# Altium PCB Test_Board.PcbDoc
Units mm, origin at the board's own origin, x right, y up, seen from the top; angles counter-clockwise.
Board outline 93.04 x 21.21 mm, 2 copper layers (Top Layer, Bottom Layer); 50 components, 41 nets, 182 pads, 23 vias.
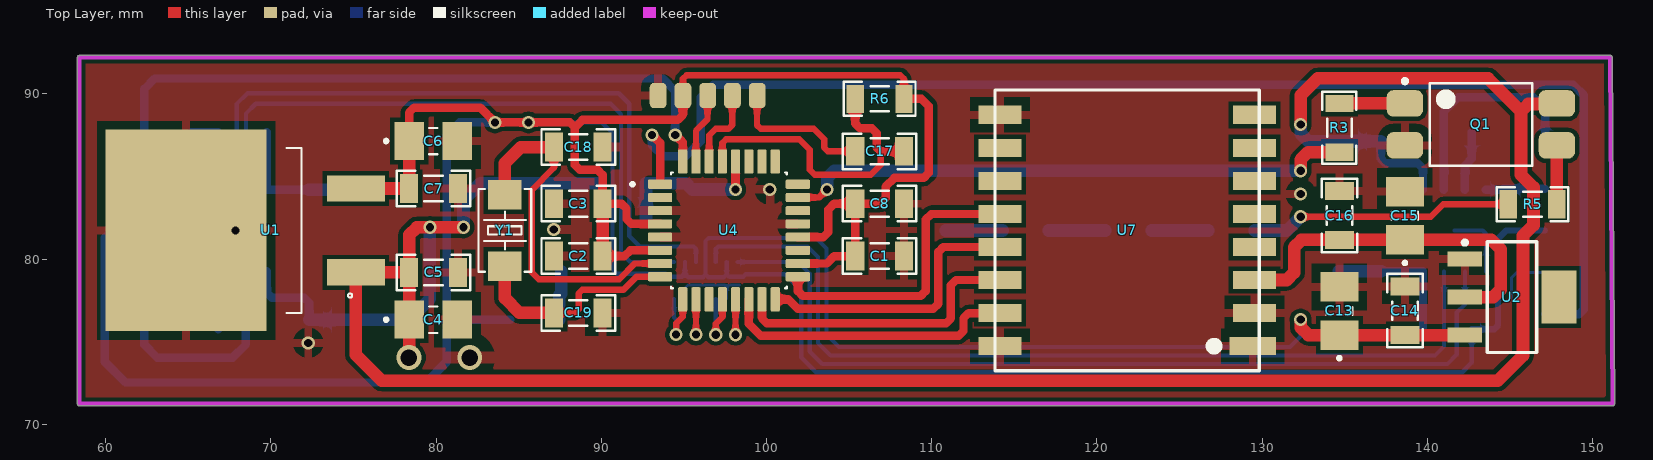
[diagram p0: Top Layer view]
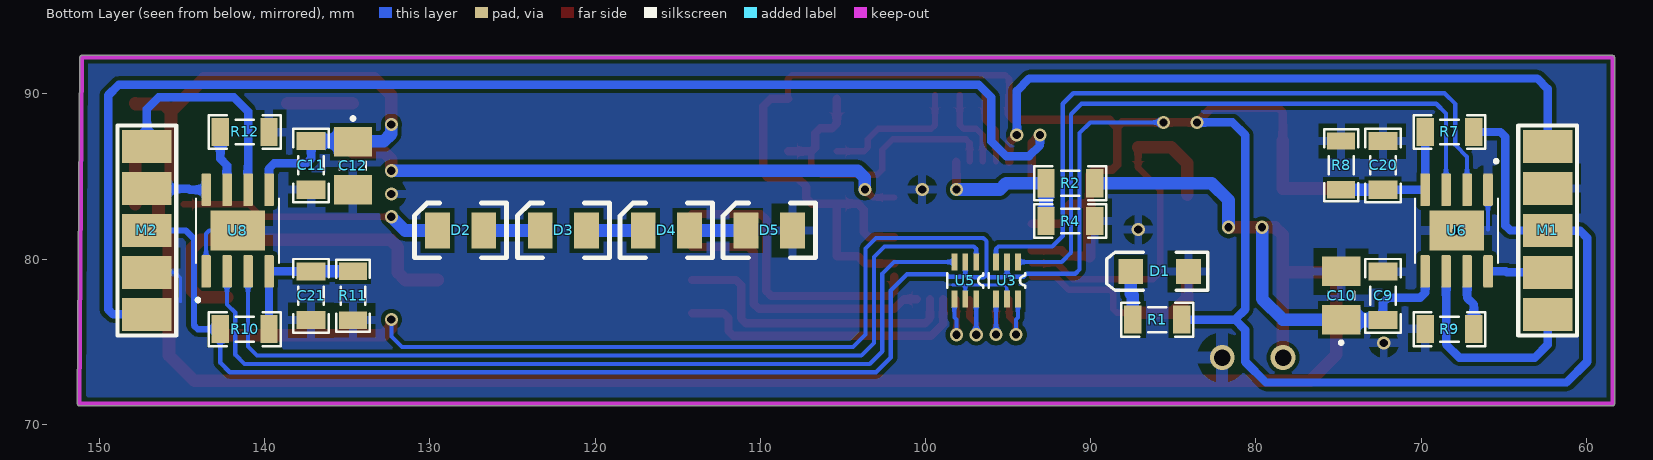
[diagram p1: Bottom Layer view, seen from below]
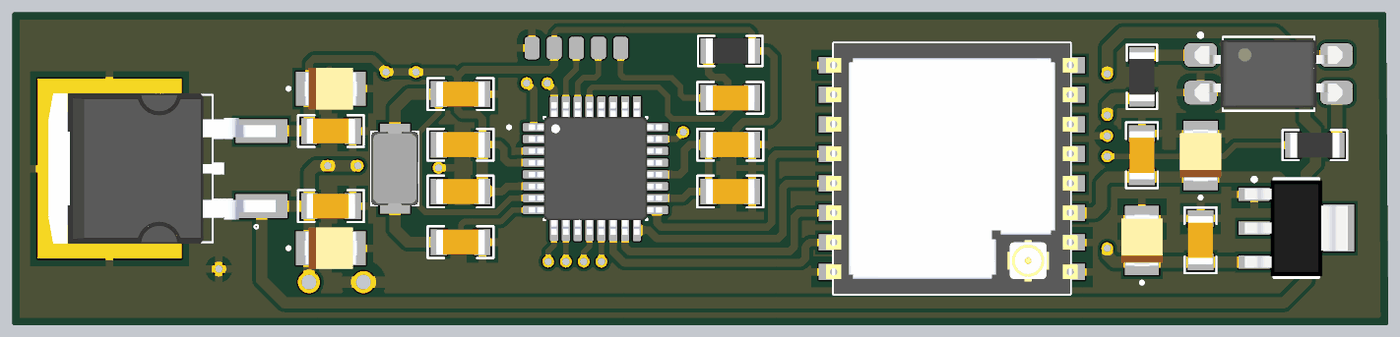
[diagram p2: 3D render of the assembled board from above, using the file's embedded part models]
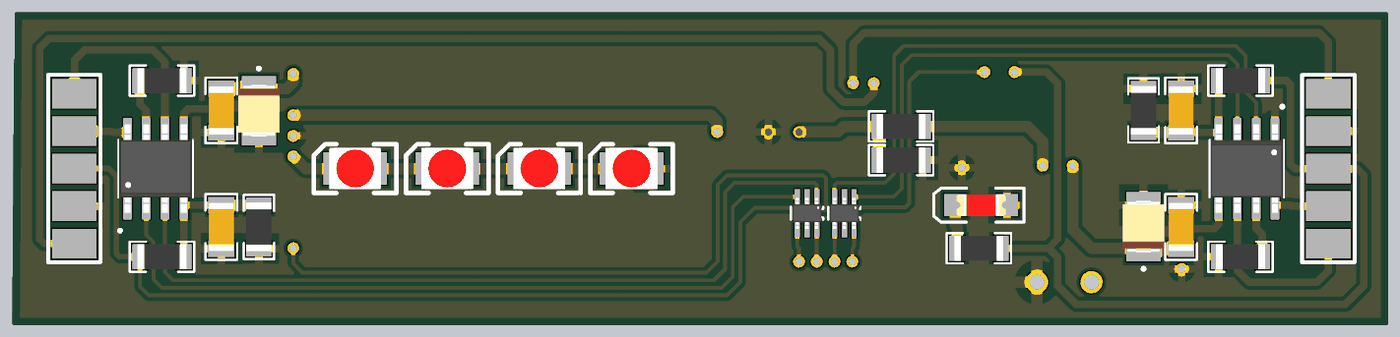
[diagram p3: 3D render of the assembled board from below, using the file's embedded part models]

## Layer stack, top to bottom
Top Solder: solder mask 0.0102, Solder Resist, Dk 3.5
Top Layer: signal copper 0.0356
Dielectric 1: dielectric 0.32, FR-4, Dk 4.8
Bottom Layer: signal copper 0.0356
Bottom Solder: solder mask 0.0102, Solder Resist, Dk 3.5

## Board outline
58.42,71.12 cw(c58.42,71.247) 58.293,71.247 58.293,92.202 cw(c58.42,92.202) 58.42,92.329 151.063,92.329 cw(c151.063,92.202) 151.191,92.203 151.335,71.248 151.335,71.247 cw(c151.208,71.247) 151.208,71.12

## Design rules (kind name [scope] priority, off if disabled: settings)
Clearance [All] p1: gap=0.254 ignorepadtopadclearanceinfootprint=FALSE except(0: Arc-Hole Track-Hole SMDPad-Hole THPad-Hole Via-Hole Fill-Hole Poly-Hole Region-Hole Text-Hole; 0.127: SMDPad-SMDPad)
ComponentClearance [All] p1: gap=0 collisioncheckmode=3 verticalgap=0.254 showdistances=FALSE
MinimumSolderMaskSliver [All] p1: minsoldermaskwidth=0
PolygonConnect [All] p1: connectstyle=Relief reliefconductorwidth=0.508 reliefentries=4 polygonreliefangle="90 Angle" airgapwidth=0.508
RoutingVias [All] p1: holewidth=0.8 width=0.8 viastyle="Through Hole" minholewidth=0.5 minwidth=0.5 maxholewidth=2 maxwidth=2
SilkToSilkClearance [All] p1: silktosilkclearance=0
SilkToSolderMaskClearance [IsPad] p1: minsilkscreentomaskgap=0 clearancetoexposedcopper=TRUE
SolderMaskExpansion [All] p1: expansion=0.102 istentingtop=FALSE
UnRoutedNet [All] p1: checkbadconnections=TRUE
Width [All] p1: maxlimit=1.27 minlimit=0.127 preferedwidth=0.508
25 further rules are at their usual default settings.

## Classes and differential pairs
component class Integrated_Test_Board: C3 C4 C5 C6 C7 C8 C9 C10 C11 C12 C14 C15 C16 C20 C21 D1 D2 D3 D4 D5 M1 M2 Q1 R1 R2 R3 R4 R5 R6 R7 R8 R9 R10 R11 R12 U1 U2 U3 U4 U5 U6 U7 U8 Y1

## Components (designator, comment, footprint, x,y, rotation, side; value= is the part's Value field where it differs from the comment)
C1 "Cap" "CAP 1206" 106.846,80.179 r0 top
C2 "Cap" "CAP 1206" 88.607,80.179 r180 top
C3 "Cap" "CAP 1206" 88.607,83.354 r180 top
C4 "Cap BiPolar" "CAP Tantalum Size B" 79.831,76.338 r0 top
C5 "Cap" "CAP 1206" 79.846,79.195 r0 top
C6 "Cap BiPolar" "CAP Tantalum Size B" 79.831,87.148 r0 top
C7 "Cap" "CAP 1206" 79.846,84.275 r0 top
C8 "Cap" "CAP 1206" 106.846,83.354 r0 top
C9 "Cap" "CAP 1206" 72.301,77.783 r90 bottom
C10 "Cap BiPolar" "CAP Tantalum Size B" 74.841,77.798 r90 bottom
C11 "Cap" "CAP 1206" 137.198,85.673 r270 bottom
C12 "Cap BiPolar" "CAP Tantalum Size B" 134.658,85.658 r270 bottom
C13 "Cap BiPolar" "CAP Tantalum Size B" 134.68,76.862 r90 top
C14 "Cap" "CAP 1206" 138.645,76.877 r90 top
C15 "Cap BiPolar" "CAP Tantalum Size B" 138.645,82.626 r90 top
C16 "Cap" "CAP 1206" 134.68,82.641 r90 top
C17 "Cap" "CAP 1206" 106.846,86.529 r180 top
C18 "Cap" "CAP 1206" 88.607,86.783 r180 top
C19 "Cap" "CAP 1206" 88.607,76.75 r180 top
C20 "Cap" "CAP 1206" 72.301,85.673 r90 bottom
C21 "Cap" "CAP 1206" 137.198,77.783 r270 bottom
D1 "LED" "LED 1206" 85.824,79.258 r0 bottom
D2 "LED" "LED 3528" 126.746,81.733 r0 bottom
D3 "LED" "LED 3528" 120.517,81.733 r0 bottom
D4 "LED" "LED 3528" 114.288,81.733 r0 bottom
D5 "LED" "LED 3528" 108.059,81.733 r0 bottom
M1 "Motor" Motor 62.344,76.655 r90 bottom
M2 "Motor" Motor 147.129,86.815 r270 bottom
Q1 "PC817" PC817 143.245,88.155 r0 top
R1 "Resistor" "RES 1206" 85.974,76.338 r180 bottom
R2 "Resistor" "RES 1206" 91.235,84.594 r180 bottom
R3 "Resistor" "RES 1206" 134.68,87.95 r270 top
R4 "Resistor" "RES 1206" 91.235,82.308 r0 bottom
R5 "Resistor" "RES 1206" 146.37,83.324 r0 top
R6 "Resistor" "RES 1206" 106.846,89.704 r0 top
R7 "Resistor" "RES 1206" 68.286,87.697 r180 bottom
R8 "Resistor" "RES 1206" 74.841,85.673 r270 bottom
R9 "Resistor" "RES 1206" 68.286,75.759 r180 bottom
R10 "Resistor" "RES 1206" 141.213,75.759 r0 bottom
R11 "Resistor" "RES 1206" 134.658,77.783 r90 bottom
R12 "Resistor" "RES 1206" 141.213,87.697 r0 bottom
U1 "LM7805" "7805 SMD" 68.445,81.735 r180 top
U2 "AMS1117" AMS1117 145.122,77.702 r0 top
U3 "GS4157B" GS4157B 95.07,78.706 r270 bottom
U4 "ATMEGA328P-AU" ATmega328 97.73,81.735 r0 top
U5 "GS4157B" GS4157B 97.593,78.706 r270 bottom
U6 "TB67H450FNG" TB67H450FNG 67.856,81.728 r270 bottom
U7 "RA-02" RA-02 121.834,81.735 r180 top
U8 "TB67H450FNG" TB67H450FNG 141.643,81.728 r90 bottom
Y1 "XTAL" Crystal-5032 84.162,81.735 r270 top

## Footprints (in the part's own frame and the unit in brackets; to place one, negate y for a bottom-side part, rotate by r counter-clockwise, add the part's x,y. Pads: shape width x height; smd on the part's side, far side on the other; paste and mask are expansions set on the pad)
"7805 SMD" [mm]
  rect 3.5x1.6 smd: 1(-6.7,2.54) 3(-6.7,-2.54)
  rect 9.75x12.2 smd paste-7: 4(3.575,0)
  silkscreen extent -6.48,-5 -2.51,5, body extent -7.71,-5.1 7.71,5.1, height 4.6
AMS1117 [mm]
  rect 2.1x0.9 smd: 1(-2.85,2.3) 2(-2.85,0) 3(-2.85,-2.3)
  rect 2.1x3.2 smd: 4(2.85,0)
  silkscreen extent -2.97,-3.35 1.5,3.42, body extent -3.49,-3.24 3.49,3.24, height 1.64
ATmega328 [mm]
  rrect25% 1.47x0.55 smd: 1(-4.17,2.8) 2(-4.17,2) 3(-4.17,1.2) 4(-4.17,0.4) 5(-4.17,-0.4) 6(-4.17,-1.2) 7(-4.17,-2) 8(-4.17,-2.8) 17(4.17,-2.8) 18(4.17,-2) 19(4.17,-1.2) 20(4.17,-0.4) 21(4.17,0.4) 22(4.17,1.2) 23(4.17,2) 24(4.17,2.8)
  rrect25% 0.55x1.47 smd: 9(-2.8,-4.17) 10(-2,-4.17) 11(-1.2,-4.17) 12(-0.4,-4.17) 13(0.4,-4.17) 14(1.2,-4.17) 15(2,-4.17) 16(2.8,-4.17) 25(2.8,4.17) 26(2,4.17) 27(1.2,4.17) 28(0.4,4.17) 29(-0.4,4.17) 30(-1.2,4.17) 31(-2,4.17) 32(-2.8,4.17)
  silkscreen extent -5.94,-3.5 3.5,3.5, body extent -4.5,-4.5 4.5,4.5, height 1.2
"CAP 1206" [mm]
  rect 1.1x1.75 smd: 1(-1.475,0) 2(1.475,0)
  silkscreen extent -2.23,-1.07 2.23,1.08, body extent -1.65,-0.85 1.65,0.85, height 0.94
"CAP Tantalum Size B" [mm]
  rect 1.79x2.31 smd: 1(-1.46,0) 2(1.46,0)
  silkscreen extent -2.95,-0.8 0.25,0.8, body extent -1.75,-1.4 1.75,1.4, height 2.1
Crystal-5032 [mil]
  rect 70x80 smd: 1(-85,0) 2(85,0)
  silkscreen extent -98,-63 98,63, body extent -98,-63 98,63, height 59
GS4157B [mil]
  rect 40x14 smd: 1(-44,26) 2(-44,0) 3(-44,-26) 4(44,-26) 5(44,0) 6(44,26)
  silkscreen extent -17,-43 17,43, body extent -41,-39 41,39, height 43
"LED 1206" [mm]
  rect 1.5x1.5 smd: 1(-1.75,0) 2(1.75,0)
  silkscreen extent -2.9,-1.15 3.2,1.15, body extent -1.65,-0.72 1.65,0.73, height 1.36
"LED 3528" [mm]
  rect 1.5x2.2 smd: 1(0,0) 2(2.8,0)
  silkscreen extent -1.39,-1.65 4.19,1.65, body extent -0.35,-1.41 3.15,1.39, height 1.8
Motor [mm]
  rect 2x3 smd: 1(0,0) 2(2.54,0) 3(5.08,0) 4(7.62,0) 5(10.16,0)
  silkscreen extent -1.27,-1.78 11.43,1.78
PC817 [mm]
  rrect50% 2.2x1.6 smd mask+0.06: 1(-4.6,1.27) 2(-4.6,-1.27) 3(4.6,-1.27) 4(4.6,1.27)
  silkscreen extent -4.72,-2.5 3.1,2.74, body extent -5,-2.29 5,2.29, height 3.89
RA-02 [mm]
  rect 2.8x1.1 smd: 1(-7.6,7)
  rect 2.6x1.1 smd: 2(-7.7,5) 3(-7.7,3) 4(-7.7,1) 5(-7.7,-1) 6(-7.7,-3) 7(-7.7,-5) 8(-7.7,-7) 9(7.7,-7) 10(7.7,-5) 11(7.7,-3) 12(7.7,-1) 13(7.7,1) 14(7.7,3) 15(7.7,5) 16(7.7,7)
  silkscreen extent -8,-8.5 8,8.5, body extent -8.5,-8.51 8.5,8.49, height 3.3
"RES 1206" [mm]
  rect 1.05x1.7 smd: 1(-1.475,0) 2(1.475,0)
  silkscreen extent -2.17,-1.02 2.17,1.02, body extent -1.65,-0.85 1.65,0.85, height 0.94
TB67H450FNG [mm]
  rrect25% 1.97x0.58 smd: 1(-2.47,1.905) 2(-2.47,0.635) 3(-2.47,-0.635) 4(-2.47,-1.905) 5(2.47,-1.905) 6(2.47,-0.635) 7(2.47,0.635) 8(2.47,1.905)
  rect 2.413x3.302 smd paste-3: 9(0,0)
  silkscreen extent -4.3,-2.51 1.95,2.51, body extent -3,-2.45 3,2.45, height 1.75

## Part data
C1: "AVCC Cap", Val-1=100nF, Val-2=22pF, Val-3=22uF
C2 C3: "VCC Cap", Val-1=100nF, Val-2=22pF, Val-3=22uF
C4 C6: "5V Regulator Cap 10uF 25V", Val-1=10uF, Val-2=100uF, Val-3=1000uF
C5 C7: "5V Regulator Cap 100nF", Val-1=100nF, Val-2=22pF, Val-3=22uF
C8: "AREF Cap", Val-1=100nF, Val-2=22pF, Val-3=22uF
C9 C10 C11 C12: "Motor Power Cap"
  C9 C11: Val-1=100nF, Val-2=22pF, Val-3=22uF
  C10 C12: Val-1=10uF, Val-2=100uF, Val-3=1000uF
C13 C14 C15 C16: "3.3V Regulator Cap"
  C13: Val-1=10uF, Val-2=100uF, Val-3=1000uF
  C14 C16: Val-1=100nF, Val-2=22pF, Val-3=22uF
  C15: Val-1=22uF, Val-2=100uF, Val-3=1000uF
C17: "Programmer Cap", Val-1=100nF, Val-2=22pF, Val-3=22uF
C18 C19: "1206 Capacitor", Val-1=100nF, Val-2=22pF, Val-3=22uF
C20 C21: "Motor Driver Cap", Val-1=100nF, Val-2=22pF, Val-3=22uF
D1 D2 D3 D4 D5: Color-1=Blue, Color-2=Red, Color-3=Green, Color-4=White
Q1: "DIP 4pin General Purpose  Photocoupler"
U1: "5V Regulator"
U2: "3V3 Regulator"
U4: "ATmega 328 Microcontroller"
U6 U8: "Motor Driver"
U7: "LoRa RA-02"
Y1: "XTAL Crystal", Val-1="12 MHz", Val-2="16 MHz"
R1 R3 R6: Val-1=1K, Val-2=10K, Val-3=220R
R2 R4: Val-1=1K, Val-2=10K, Val-3=220R, Val-4=100K, Val-5=24.9K, Val-6=8.2K, Val-7=43K, Val-8=150R, Val-9=100m, Val-10=6K, Val-11=4K, Val-12=1.2K
R5: Val-1=1K, Val-2=10K, Val-3=220R, Val-4=100K, Val-5=24.9K, Val-6=8.2K, Val-7=43K, Val-8=150R
R7 R8 R9 R10 R11 R12: Val-1=1K, Val-2=10K, Val-3=220R, Val-4=100K, Val-5=24.9K, Val-6=8.2K, Val-7=43K, Val-8=150R, Val-9=100m, Val-10=6K, Val-11=4K

## Free pads (board coordinates)
  rrect50% 1.016x1.524 smd: 1(93.441,89.904) 2(94.941,89.904) 3(96.441,89.904) 4(97.941,89.904) 5(99.441,89.904)

## Via types
v1: diameter 0.8, hole 0.5, Top Layer to Bottom Layer, 21 vias
v2: diameter 1.5, hole 1, Top Layer to Bottom Layer, 2 vias

## Nets (pads, with @x,y where several pads share a name; then routed paths per layer and width w, separated by ;. In a path a pad name is that pad's centre, name@x,y a point inside that pad or via, vN(x,y) a via of type N, cw(c..) or ccw(c..) an arc to the next point about the centre after c; other vN are vias at no path point)
+3V3: C15.1 C16.1 U2.2 U7.3 | length 21.9
  Top Layer w0.762: U7.3 131.493,78.735 131.94,79.181 131.94,80.72 132.386,81.166 C15.1 143.881,81.166 144.439,80.608 144.439,78.148 143.993,77.702 U2.2
+5V: C1.1 C2.1 C3.1 C6.1 C7.1 C8.1 C13.1 C14.1 M1.3 M2.3 pad.2 R1.2 R6.2 R7.2 R10.2 U1.3 U2.3 U3.2 U4.4 U4.6 U4.18 U4.20 U5.2 | length 285.9
  Top Layer w0.381: pad.2 94.941,90.913 95.163,91.135 108.098,91.135 108.321,90.911 R6.2
  Top Layer w0.508: C6.1 78.371,88.868 78.669,89.166 82.677,89.166 v1(83.566,88.277) v1(85.598,88.277) 88.109,88.277 88.406,87.979 ; C2.1 91.401,80.179 91.757,80.535 U4.6 ; U4.4 91.826,82.135 91.528,82.432 91.528,83.056 91.231,83.354 C3.1 90.082,85.102 89.785,85.4 88.704,85.4 88.406,85.697 88.406,87.979 ; pad.2 94.941,88.729 94.639,88.428 88.855,88.428 88.406,87.979 ; U4.18 103.657,79.735 104.101,80.179 C1.1 C8.1 ; U4.20 103.448,81.335 103.746,81.632 103.746,83.006 104.094,83.354 C8.1 ; R6.2 109.385,89.704 109.816,89.272 109.816,85.215 109.519,84.917 107.742,84.917 107.216,84.391 107.216,83.699 106.87,83.354 C8.1
  Top Layer w0.762: U1.3 C7.1 C6.1 ; C2.1 C3.1 ; v1(132.334,76.339) 132.341,76.332 132.341,75.859 132.798,75.402 C13.1 C14.1 U2.3
  Bottom Layer w0.254: v1(85.598,88.277) 90.031,88.277 90.678,87.63 90.678,79.375 90.937,79.116 93.893,79.116 94.074,78.934 94.88,78.934 95.061,79.116 ; U3.2 95.061,79.814 95.061,79.116 ; U5.2 97.593,79.083 ; v1(132.334,76.339) 132.334,75.311 131.699,74.676 104.394,74.676 103.632,75.438 103.632,80.645 102.997,81.28 96.508,81.28 96.316,81.088 96.316,79.058 ; R10.2 142.688,73.727 142.113,73.152 102.997,73.152 102.108,74.041 102.108,78.105 101.13,79.083 98.738,79.083 98.589,78.934 97.742,78.934 97.593,79.083 ; 95.061,79.116 95.268,78.909 96.168,78.909 96.316,79.058 ; 96.316,79.058 96.329,79.058 96.478,78.909 97.419,78.909 97.593,79.083
  Bottom Layer w0.381: R10.2 144.059,75.759 144.282,75.983 144.282,81.243 144.775,81.735 M2.3
  Bottom Layer w0.508: R7.2 65.195,87.697 64.897,87.4 64.897,82.033 64.599,81.735 M1.3 62.336,81.727 60.379,81.727 59.944,81.292 59.944,73.787 61.198,72.533 79.391,72.533 80.645,73.787 80.645,75.715 81.269,76.338 ; v1(83.566,88.277) 81.419,88.277 80.645,87.503 80.645,76.962 81.269,76.338 ; R1.2 81.269,76.338
+12V: C4.1 C5.1 C9.1 C10.1 C11.1 C12.1 Q1.4 R2.2 U1.1 U6.5 U8.5 | length 163.3
  Top Layer w0.762: v2(78.359,74.041) 78.365,74.047 78.365,76.332 C4.1 C5.1 ; v1(81.661,81.927) v1(79.629,81.927) 78.837,81.927 78.371,81.462 C5.1 ; v1(132.334,88.15) 132.334,89.916 133.362,90.944 143.675,90.944 145.674,88.946 ; Q1.4 147.813,89.392 146.12,89.392 145.674,88.946 ; C5.1 U1.1 75.145,74.207 76.708,72.644 144.272,72.644 145.796,74.168 145.796,81.419 146.431,82.054 146.431,84.34 145.674,85.097 145.674,88.946
  Bottom Layer w0.508: U6.5 69.761,77.962 70.058,77.664 72.018,77.664 72.316,77.367 C9.1@72.316,76.323 ; C11.1@137.183,87.133 137.183,86.09 137.48,85.792 139.44,85.792 139.738,85.495 U8.5
  Bottom Layer w0.762: C9.1@72.316,76.323 74.826,76.323 C10.1 78.37,76.338 79.629,77.597 v1(79.629,81.927) ; v1(81.661,81.927) 81.661,83.566 82.689,84.594 R2.2 ; v1(132.334,88.15) 132.341,88.143 132.341,87.591 132.798,87.134 134.672,87.134 C11.1@137.183,87.133
AIN: U3.6 U4.9 | length 4.5
  Top Layer w0.381: v1(94.53,75.431) 94.53,76.12 94.93,76.52 U4.9
  Bottom Layer w0.254: U3.6 94.41,76.459 94.53,76.339 v1(94.53,75.431)
AIN1: U3.1 U6.3 | length 39.7
  Bottom Layer w0.254: U6.3 68.491,88.811 69.088,89.408 90.551,89.408 91.186,88.773 91.186,80.391 91.754,79.823 U3.1
AIN2: U3.3 U6.2 | length 42.9
  Bottom Layer w0.254: U6.2 67.221,86.194 67.932,86.905 67.932,89.395 68.58,90.043 91.059,90.043 91.694,89.408 91.694,81.407 92.329,80.772 95.582,80.772 95.73,80.623 U3.3
BIN: U4.12 U5.6 | length 4.5
  Top Layer w0.381: v1(96.932,75.429) 96.932,76.083 97.33,76.481 U4.12
  Bottom Layer w0.254: v1(96.932,75.429) U5.6
BIN1: U5.1 U8.3 | length 55.5
  Bottom Layer w0.254: U5.1 96.932,80.623 97.081,80.772 102.489,80.772 103.124,80.137 103.124,74.93 103.886,74.168 140.462,74.168 141.008,74.714 U8.3
BIN2: U5.3 U8.2 | length 54.3
  Bottom Layer w0.254: U5.3 101.914,79.823 102.616,79.121 102.616,74.422 103.378,73.66 141.224,73.66 141.782,74.218 141.782,76.767 142.278,77.263 U8.2
ENC_1: M1.5 U4.32 | length 40.7
  Top Layer w0.508: v1(94.475,87.52) 94.93,87.064 U4.32
  Bottom Layer w0.508: M1.5 62.344,90.31 62.966,90.932 93.726,90.932 94.475,90.183 v1(94.475,87.52)
ENC_2: M2.5 U4.1 | length 79.5
  Top Layer w0.508: v1(93.078,87.52) 93.56,87.037 U4.1
  Bottom Layer w0.508: v1(93.078,87.52) 93.078,86.881 93.726,86.233 95.123,86.233 96.012,87.122 96.012,89.789 96.774,90.551 148.844,90.551 149.473,89.922 149.473,76.953 149.175,76.655 M2.5
GND: C1.2 C2.2 C3.2 C4.2 C5.2 C6.2 C7.2 C8.2 C9.2 C10.2 C11.2 C12.2 C13.2 C14.2 C15.2 C16.2 C18.1 C19.1 C20.2 C21.2 D1.1 D5.1 M1.4 M2.4 pad.1 Q1.2 R4.1 R8.1 R9.1 R11.1 R12.1 U1.4 U2.1 U3.5 U4.3 U4.5 U4.21 U5.5 U6.1 U6.9 U7.1 U7.2 U7.9 U7.16 U8.1 U8.9 | length 15.2
  Bottom Layer w0.178: U3.5 95.075,77.593 95.075,78.259 95.255,78.439 97.456,78.439 97.593,78.302 ; U5.5 97.593,78.302 ; 98.372,78.439 97.73,78.439 97.593,78.302 ; 145.11,77.419 145.11,77.698 145.11,78.893 145.412,79.195 M2.4
  Bottom Layer w0.254: 65.951,81.788 U6.1 ; U8.9 143.358,81.728 143.548,81.538 U8.1
  other v1: 72.263,74.93 67.856,81.728 87.122,81.788 132.334,83.947 100.203,84.213
  other v2: 82.042,74.041
LED_C: R3.2 U4.23 | length 34.7
  Top Layer w0.381: U4.23 103.187,83.735 103.663,84.211 v1(103.67,84.211)
  Top Layer w0.762: v1(132.334,85.356) 132.334,86.021 132.788,86.475 R3.2
  Bottom Layer w0.762: v1(103.67,84.211) 103.67,84.91 104.116,85.356 v1(132.334,85.356)
LED_P: Q1.3 R5.2 | length 3.6
  Top Layer w0.762: R5.2 Q1.3
MA1: M1.1 U6.6 | length 13.1
  Bottom Layer w0.508: M1.1 62.344,74.816 63.119,74.041 67.691,74.041 68.491,74.841 U6.6
MA2: M1.2 U6.8 | length 3.6
  Bottom Layer w0.508: M1.2 64.814,79.195 64.878,79.258 U6.8
MB1: M2.1 U8.6 | length 13.8
  Bottom Layer w0.508: U8.6 141.008,88.938 141.859,89.789 146.431,89.789 147.129,89.091 M2.1
MB2: M2.2 U8.8 | length 3.6
  Bottom Layer w0.508: U8.8 144.544,84.198 144.602,84.256 M2.2@147.11,84.256
MISO: U4.16 U7.13 | length 17.2
  Top Layer w0.508: U4.16 101.321,77.565 101.882,77.004 110.103,77.004 110.401,77.301 110.401,80.437 110.698,80.735 U7.13
MOSI: U4.15 U7.14 | length 17.9
  Top Layer w0.508: U4.15 99.73,76.412 100.028,76.115 110.865,76.115 111.163,76.412 111.163,78.426 111.471,78.735 U7.14
NetC17_2: C17.2 pad.5 | length 8.7
  Top Layer w0.381: pad.5@99.428,89.933 99.428,88.107 99.651,87.884 102.87,87.884 103.492,87.262 103.492,86.752 103.715,86.529 C17.2
NetC20_1: C20.1 R7.1 R8.2 U6.4 | length 8.6
  Bottom Layer w0.508: R7.1 U6.4 C20.1
  Bottom Layer w0.762: C20.1 R8.2
NetC21_1: C21.1 R10.1 R11.2 U8.4 | length 8.6
  Bottom Layer w0.508: C21.1 U8.4 R10.1
  Bottom Layer w0.762: R11.2 C21.1
NetD1_2: D1.2 R1.1 | length 3
  Bottom Layer w0.762: R1.1 87.449,77.797 87.574,77.922 D1.2
NetD2_1: D2.1 D3.2 | length 3.4
  Bottom Layer w0.762: D3.2 D2.1
NetD2_2: D2.2 R5.1 | length 16
  Top Layer w0.381: v1(132.334,82.562) 140.208,82.562 140.97,83.324 R5.1
  Bottom Layer w0.762: D2.2 131.505,81.733 v1(132.334,82.562)
NetD3_1: D3.1 D4.2 | length 3.4
  Bottom Layer w0.762: D4.2 D3.1
NetD4_1: D4.1 D5.2 | length 3.4
  Bottom Layer w0.762: D5.2 D4.1
NetQ1_1: Q1.1 R3.1 | length 4
  Top Layer w0.762: R3.1 Q1.1
NetR9_2: R9.2 U6.7 | length 3.7
  Bottom Layer w0.508: R9.2 66.811,77.254 67.221,77.664 U6.7
NetR12_2: R12.2 U8.7 | length 3.7
  Bottom Layer w0.508: U8.7 142.278,85.665 142.688,86.075 R12.2
NSS: U4.14 U7.15 | length 18
  Top Layer w0.508: U4.14 98.93,76.079 99.656,75.353 111.627,75.353 111.925,75.65 111.925,76.427 112.233,76.735 U7.15
PWMA: U3.4 U4.10 | length 4.3
  Top Layer w0.381: v1(95.73,75.431) U4.10
  Bottom Layer w0.254: v1(95.73,75.431) U3.4
PWMB: U4.13 U5.4 | length 4.3
  Top Layer w0.381: U4.13 98.13,75.431 v1(98.132,75.429)
  Bottom Layer w0.254: v1(98.132,75.429) 98.132,76.344 98.253,76.464 U5.4
RST: C17.1 R6.1 U4.29 | length 19.2
  Top Layer w0.381: U4.29 97.33,87.026 97.554,87.249 101.981,87.249 102.616,86.614 102.616,85.418 102.927,85.107 106.315,85.107 106.921,85.712 106.921,86.331 107.119,86.529
  Top Layer w0.508: R6.1 105.371,88.209 105.669,87.912 106.386,87.912 106.683,87.614 106.683,86.741 106.895,86.529 C17.1
RX: pad.3 U4.31 | length 4.3
  Top Layer w0.381: U4.31 95.73,87.759 96.428,88.457 pad.3@96.428,89.933
SCK: U4.17 U7.12 | length 17.8
  Top Layer w0.508: U4.17 101.9,78.064 102.198,77.766 109.341,77.766 109.639,78.063 109.639,82.396 109.978,82.735 U7.12
TX: pad.4 U4.30 | length 5.1
  Top Layer w0.381: U4.30 96.53,87.492 96.934,87.896 97.705,87.896 97.928,88.119 pad.4@97.928,89.933
V_Meter: R2.1 R4.2 U4.28 | length 9.6
  Top Layer w0.508: v1(98.13,84.213) U4.28
  Bottom Layer w0.762: R4.2 R2.1 95.123,84.594 95.504,84.213 v1(98.13,84.213)
XTAL1: C18.2 U4.7 Y1.1 | length 21.8
  Top Layer w0.381: C18.2 87.132,85.522 85.788,84.177 85.788,79.205 86.211,78.782 91.082,78.782 92.035,79.735 U4.7
  Top Layer w0.762: Y1.1 84.162,85.813 85.132,86.783 C18.2
XTAL2: C19.2 U4.8 Y1.2 | length 13.2
  Top Layer w0.381: C19.2 88.41,76.75 88.633,76.973 88.633,77.924 88.856,78.147 91.345,78.147 92.133,78.935 U4.8
  Top Layer w0.762: Y1.2 84.162,77.636 85.048,76.75 C19.2
pads on no net: U2.4 U4.2 U4.11 U4.19 U4.22 U4.24 U4.25 U4.26 U4.27 U7.4 U7.5 U7.6 U7.7 U7.8 U7.10 U7.11

## Polygon pours and split planes (outlines as drawn)
GND on Top Layer "G_Top" (solid, remove dead copper, pour order 1): 58.166,92.456 151.384,92.456 151.384,70.993 58.166,70.993
GND on Bottom Layer "G_Bottom" (solid, remove dead copper, pour order 0): 58.166,92.456 151.384,92.456 151.384,70.993 58.166,70.993

## Keep-outs
Keep-Out Layer:
  lines w0.254: 58.42,71.247 151.208,71.247 151.063,92.202 58.42,92.202 58.42,71.247